# Altium PCB PCB1.PcbDoc (part 2 of 2)
Units mm, origin at the board's own origin, x right, y up, seen from the top; angles counter-clockwise.
Board outline 99.82 x 99.95 mm, 2 copper layers (Top Layer, Bottom Layer); 59 components, 66 nets, 248 pads, 0 vias.
Unrouted connection lines stored in the file: 139.
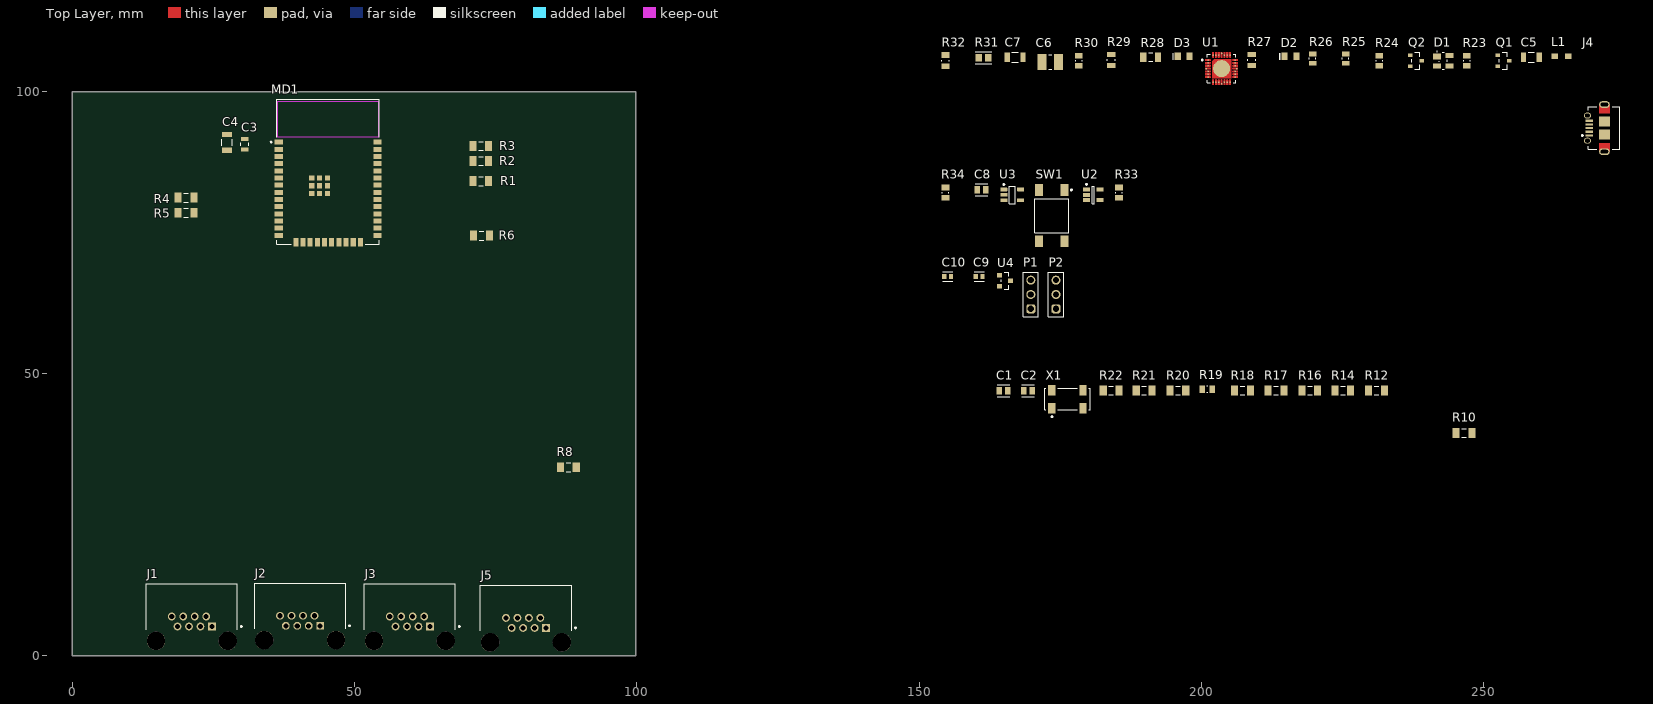
[diagram p0: Top Layer view]

## Part data (continued)
R27 R29: library part CMP-2001-03823-2, "RES Thick Film, 330Ω, 1%, 0.125W, 100ppm/°C, 0805", Case Code (Imperial)=0805, Case Code (Metric)=2012, Manufacturer=Vishay, Max Operating Temperature=155°C, Max Power Dissipation=125mW, Min Operating Temperature=-55°C, Package Height=0.45mm, Package Length=2mm, Package Quantity=10, Package Shape=Rectangular, Package Style=SMTMeter, Package Width=1.25mm, Rated Temperature=70°C, Resistance=330R, Resistor Type="FIXED RESISTOR", Supplier Part Number=541-330CCT-ND, Temperature Coefficient=100ppm/°C, Tolerance=1%, Voltage Rating=150V, Case/Package=0805, Category="Chip SMD Resistors", ComponentLink1Description=https://datasheet.ciiva.com:443/pdfs/VipMasterIC/IC/VISH/VISH-S-A0007266705/VISH-S-A0007266705-1.pdf?src-supplier=IHS+Markit, ComponentLink1URL=https://datasheet.ciiva.com:443/pdfs/VipMasterIC/IC/VISH/VISH-S-A0007266705/VISH-S-A0007266705-1.pdf?src-supplier=IHS+Markit, Composition="Thick Film", Construction=Chip, Contact Plating=Tin, Depth=1.25mm, Features="Automotive AEC-Q200", Height=0.02inch, JESD-609 Code=e3, Lead Free="Lead Free", Length=2mm, Manufacturer Part Number=CRCW0805330RFKEA, Military Standard=Not, Mount="Surface Mount", Mounting Technology="Surface Mount", Number of Terminations=2, Packaging="Tape and Reel", Pins=2, Power=125mW, Power Rating=125mW, Pricing="1=0.1, 10=0.038, 50=0.0248, 100=0.021, 500=0.01462, 1000=0.01273 (USD)", Reach SVHC Compliant=Yes, Reference Standard=AEC-Q200, RoHS=Yes, RoHS Compliant=Yes, Stock=41783, Supplier=Digikey, Technology="METAL GLAZE/THICK FILM", Terminal Finish=Nickel, Termination=SMD/SMT, Voltage Rating (DC)=150V, Weight=0.000194oz, Width=0.049inch, Working Voltage=150V
R28: library part CMP-2003-02566-1, Case/Package=1206, Manufacturer=Susumu, Max Operating Temperature=155°C, Min Operating Temperature=-55°C, Package Height=0.5mm, Package Length=3.2mm, Package Shape=Rectangular, Package Style=SMTMeter, Package Width=1.6mm, Power=250mW, Rated Temperature=85°C, Resistor Type="FIXED RESISTOR", Supplier Part Number=RG32P2.0KBCT-ND, Temperature Coefficient=25ppm/°C, Tolerance=0.1%, Working Voltage=150V, Additional Feature="ULTRA PRECISION", Category="Chip SMD Resistors", ComponentLink1Description=https://datasheet.ciiva.com:443/pdfs/VipMasterIC/IC/SUSU/SUSUS00222/SUSUS00222-1.pdf?src-supplier=IHS+Markit, ComponentLink1URL=https://datasheet.ciiva.com:443/pdfs/VipMasterIC/IC/SUSU/SUSUS00222/SUSUS00222-1.pdf?src-supplier=IHS+Markit, ComponentLink2Description=https://datasheet.ciiva.com/2490/rg-rm-rgh-datasheet-2490469.pdf?src-supplier=Digikey, ComponentLink2URL=https://datasheet.ciiva.com/2490/rg-rm-rgh-datasheet-2490469.pdf?src-supplier=Digikey, ComponentLink3Description=https://datasheet.ciiva.com/7984/1369790-7984253.pdf?src-supplier=Element14, ComponentLink3URL=https://datasheet.ciiva.com/7984/1369790-7984253.pdf?src-supplier=Element14, Construction=Chip, JESD-609 Code=e3, Manufacturer Part Number=RG3216P-2001-B-T1, Mounting Technology="Surface Mount", Packaging="Tape and Reel", Part Number=RG3216P-2001-B-T1, Pins=2, Pricing="1=0.39, 10=0.285, 50=0.2202, 100=0.1956, 500=0.14638 (USD)", RoHS=Yes, RoHS Compliant=Yes, Stock=9791, Supplier=Digikey, Technology="METAL FILM", Terminal Finish=Tin, Termination=Wraparound
R31: library part CMP-26527-001411-1, "22.1kΩ ±1% 0.125W 0805 Thick Film Chip Resistor AEC-Q200 compliant", Case Code (Imperial)=0805, Case Code (Metric)=2012, Manufacturer="Stackpole Electronics", Max Operating Temperature=155°C, Max Power Dissipation=125mW, Min Operating Temperature=-55°C, Package Height=0.5mm, Package Length=2mm, Package Shape=Rectangular, Package Style=SMTMeter, Package Width=1.25mm, Rated Temperature=70°C, Resistance=22.1kR, Resistor Type="Thick Film", Supplier Part Number=RMCF0805FT22K1CT-ND, Temperature Coefficient=100ppm/°C, Tolerance=1%, Working Voltage=150V, Case/Package=0805, Category="Chip SMD Resistors", ComponentLink1Description=https://datasheet.ciiva.com:443/pdfs/VipMasterIC/IC/SEIE/SEIE-S-A0009541969/SEIE-S-A0009541969-1.pdf?src-supplier=IHS+Markit, ComponentLink1URL=https://datasheet.ciiva.com:443/pdfs/VipMasterIC/IC/SEIE/SEIE-S-A0009541969/SEIE-S-A0009541969-1.pdf?src-supplier=IHS+Markit, ComponentLink2Description=https://datasheet.ciiva.com/15193/getdatasheetpartid-409700-15193558.pdf?src-supplier=Verical, ComponentLink2URL=https://datasheet.ciiva.com/15193/getdatasheetpartid-409700-15193558.pdf?src-supplier=Verical, Construction=Rectangular, Contact Plating=Tin, Depth=1.25mm, Features="Automotive AEC-Q200", Height=0.026inch, JESD-609 Code=e3, Lead Free="Lead Free", Length=0.079inch, Manufacturer Part Number=RMCF0805FT22K1, Military Standard=Not, Mount="Surface Mount", Mounting Technology="Surface Mount", Number of Terminations=2, Packaging="Tape and Reel", Pins=2, Power=125mW, Power Rating=125mW, Pricing="1=0.1, 10=0.02, 50=0.0124, 100=0.0103, 500=0.007, 1000=0.00601 (USD)", Radiation Hardening=No, Reach SVHC Compliant=Yes, Reference Standard=AEC-Q200, RoHS=Yes, RoHS Compliant=Yes, Series=RMCF, Size Code=0805, Stock=745768, Supplier=Digikey, Technology="METAL GLAZE/THICK FILM", Terminal Finish=Nickel, Termination=Wraparound, Width=0.049inch
R32: library part CMP-03211-007667-1, "SMD Chip Resistor, Thin Film, 47.5KΩ, 100 V, 0805 [2012 Metric], 100 mW, 0.1%, RN73 Series", Case/Package=0805, Manufacturer="TE Connectivity", Manufacturer Series=RN73, Max Operating Temperature=125°C, Min Operating Temperature=-55°C, Package=RN732A, Package Shape=Rectangular, Power=100mW, Power Rating=0.1W, Rated Temperature=70°C, Resistance=47.5KΩ, Resistor Type="FIXED RESISTOR", Supplier Part Number=A119902CT-ND, Temperature="-55°C to 155°C", Temperature Coefficient=10ppm/°C, Temperature Range High=155°C, Tolerance=0.1%, Voltage Rating=100V, Additional Feature=PRECISION, Automotive=No, Category=Res, ComponentLink1Description=https://datasheet.ciiva.com:443/pdfs/VipMasterIC/IC/TYEC/TYECS00448/TYECS00448-1.pdf?src-supplier=IHS+Markit, ComponentLink1URL=https://datasheet.ciiva.com:443/pdfs/VipMasterIC/IC/TYEC/TYECS00448/TYECS00448-1.pdf?src-supplier=IHS+Markit, ComponentLink2Description=Datasheet, ComponentLink2URL=https://www.te.com/commerce/DocumentDelivery/DDEController?Action=showdoc&DocId=Data+Sheet%7F1773270%7FP%7Fpdf%7FEnglish%7FENG_DS_1773270_P.pdf%7F1676162-2, ComponentLink3Description=https://datasheet.ciiva.com/2547/eng-ds-1773270-m-2547934.pdf?src-supplier=Digikey, ComponentLink3URL=https://datasheet.ciiva.com/2547/eng-ds-1773270-m-2547934.pdf?src-supplier=Digikey, Composition="Thin Film", Device Class L1="Passive Components", Device Class L2=Resistors, Device Class L3="Chip SMD Resistors", Height=0.65mm, Ipc Land Pattern Name=RESC200125X55, Lead Free=Yes, Manufacturer Part Number=RN73C2A47K5BTD, Mounting Technology="Surface Mount", Octopart=https://octopart.com/rn73c2a47k5btd-te+connectivity-22736876, octopart_url=https://octopart.com/rn73c2a47k5btd-te+connectivity-22736876, Packaging="5000 Reel", Pins=2, Pricing="1=0.73, 10=0.521, 50=0.3986, 100=0.3526, 500=0.26204, 1000=0.22944 (USD)", RoHS=TRUE, RoHS Compliant=Yes, Series=RN73, Stock=2760, Supplier=Digikey, Technology="THIN FILM", Temperature Range Low=-55°C, Termination=Wraparound, Working Voltage=100V
SW1: library part CMP-2000-07486-1, "Micro Miniature Push Button Switch FSM JSM, 50 mA, -35 to 85 degC, 4-Pin SMD, RoHS, Tape and Reel", Capacitance=0f, Case\/Package=SMD/SMT, Contact Current Rating=50mA, Contact DC Max Rating R Load=.05A@12VDC, Contact Resistance=100mOhm, Contact Voltage(DC)-Max=12V, Manufacturer="TE Connectivity", Max Operating Temperature=85degC, Min Operating Temperature=-35degC, Operating Force=160gf, Operating Force-Max=2.06N, Package Description="4-Pin Surface Mount Device, Body 6 x 6 mm, Pitch 4.5 mm", Package Quantity=1200, Supplier Part Number=450-1759-1-ND, Voltage Rating (DC)=24V, Actuator Length=0.055inch, Actuator Material=Polyamide, Body Breadth=6inch, Body Height=3.6mm, Body Length or Diameter=6mm, Category="Pushbutton Switches", Circuit Configuration=1X1, ComponentLink1Description=https://datasheet.ciiva.com:443/pdfs/VipMasterIC/IC/TYEL/TYEL-S-A0008743874/TYEL-S-A0008712894-1.pdf?src-supplier=IHS+Markit, ComponentLink1URL=https://datasheet.ciiva.com:443/pdfs/VipMasterIC/IC/TYEL/TYEL-S-A0008743874/TYEL-S-A0008712894-1.pdf?src-supplier=IHS+Markit, ComponentLink2Description=https://datasheet.ciiva.com/5801/eng-cd-2-1437565-7-u2-5801346.pdf?src-supplier=Farnell, ComponentLink2URL=https://datasheet.ciiva.com/5801/eng-cd-2-1437565-7-u2-5801346.pdf?src-supplier=Farnell, ComponentLink3Description=https://datasheet.ciiva.com/23765/1486934-23765878.pdf?src-supplier=Newark, ComponentLink3URL=https://datasheet.ciiva.com/23765/1486934-23765878.pdf?src-supplier=Newark, ComponentLink4Description=https://datasheet.ciiva.com/1530/1683375-1530944.pdf?src-supplier=Element14, ComponentLink4URL=https://datasheet.ciiva.com/1530/1683375-1530944.pdf?src-supplier=Element14, ComponentLink5Description=https://datasheet.ciiva.com/16320/eng-cs-1308111-1-switches-core-program-catalog-0308-16320065.pdf?src-supplier=Future+Electronics, ComponentLink5URL=https://datasheet.ciiva.com/16320/eng-cs-1308111-1-switches-core-program-catalog-0308-16320065.pdf?src-supplier=Future+Electronics, ComponentLink6Description=https://datasheet.ciiva.com/7638/921681-7638037.pdf?src-supplier=Element14, ComponentLink6URL=https://datasheet.ciiva.com/7638/921681-7638037.pdf?src-supplier=Element14, Contact Current(DC)-Max=50mA, Contact Material=CopperAlloy, Contact Plating=Silver, Current Rating=50mA, Datasheet URL=http://www.te.com/commerce/DocumentDelivery/DDEController?Action=showdoc&DocId=Customer+Drawing%7F2-1437565-7%7FV%7Fpdf%7FEnglish%7FENG_CD_2-1437565-7_V.pdf%7F4-1437565-2, Datasheet Version="Rev. V, 02/2015", Electrical Life=100000Cycles, Illumination Type=Illuminated, JESD-609 Code=e4, Manufacturer Part Number=FSM4JSMATR, Manufacturer URL=http://www.te.com/, Max Voltage Rating (DC)=12V, Mechanical Life=100000Cycles, Mount=SurfaceMount, Mounting Technology=SurfaceMount, Number of Switches=1, Orientation=Straight, Package Reference=FSM4JSMATR, Packaging=TapeandReel, Pricing="1=0.36, 10=0.351, 25=0.33, 100=0.2866, 250=0.26, 500=0.24188 (USD)", REACH SVHC=Unknown, Reach SVHC Compliant=Yes, RoHS=Yes, RoHS Compliant=Yes, RoHSCompliant=true, Stock=69097, Supplier=Digikey, Switch Action=MOMENTARY-TACTILE, Switch Function=SPST, Switch Travel=0.25mm, Switch Type=Keypad, Terminal Finish=Silver, Termination=GullWing, Throw Configuration=SPST
U1: library part CMP-08093-000007-1, "IC USB TO UART BRIDGE QFN28"
U2: library part CMP-0138-00207-1, "Voltage Supervisor, 5-Pin SOT-23, Extended Temperature, Tape and Reel", Code_IPC=SOT23-5, DatasheetVersion="revB, Oct-2007", PackageDescription="5-Lead Plastic Small Outline Transistor (OT) [SOT-23]", PackageReference=SOT-23-OT5, PackageVersion="revBB, Aug-2009"
U3: library part CMP-0859-00053-3, "Single 2-Input Positive-AND Gate, DBV0005A, LARGE T&R", F @ Nom Voltage(Max)(Mhz)=150, Generic Part Number=SN74LVC1G08, ICC @ Nom Voltage(Max)(mA)=0.01, Manufacturer="Texas Instruments", Operating Temperature Range(C)="-40 to 125,-40 to 85", Rating=Catalog, tpd @ Nom Voltage(Max)(ns)=4.5,6,4,5, Voltage(Nom)(V)=1.8,2.5,3.3,5, 3-State Output=No, Bits(#)=1, DatasheetVersion=SCES217Y, Gate Type=AND, Input Type=CMOS/TTL, Logic=True, Output Drive (IOL/IOH)(Max)(mA)=32/-32, Output Type=CMOS, PackageReference=DBV0005A, Schmitt Trigger=No, Sub-Family="AND Gate", Technology Family=LVC, VCC(Max)(V)=5.5, VCC(Min)(V)=1.65
U4: library part CMP-12756-000008-1, "IC REG LINEAR 3.3V 150MA SOT23", Case/Package=TSSOP, Dropout Voltage=300mV, Input Voltage Absolute-Max=6.5V, Manufacturer="Diodes Inc.", Max Junction Temp=+85°C, Max Supply Voltage=6V, Min Input Voltage=2V, Nominal Supply Current=25uA, Operating Temperature, TJ-Max=85°C, Operating Temperature, TJ-Min=-40°C, Output Current=150mA, Output Current1-Max=100mA, Output Voltage=3.3V, Output Voltage1-Max=3.366V, Output Voltage1-Min=3.234V, Package=SOT23, Package Body Material=Plastic, Package Equivalence Code=TO-236, Package Shape=Rectangular, Package Style="SMALL OUTLINE, THIN PROFILE, SHRINK PITCHMeter", Peak Reflow Temperature (Cel)=260°C, Supplier Part Number=AP2120N-3.3TRG1DICT-ND, Temperature="-40°C to +85°C", Time @ Peak Reflow Temperature-Max (s)=30s, Voltage Tolerance-Max=2%, Accuracy Percentage=2%, Adjustability=FIXED, Automotive=No, Category=IC, Channels=1, ComponentLink1Description=https://datasheet.ciiva.com:443/pdfs/VipMasterIC/IC/DIOD/DIOD-S-A0008513436/DIOD-S-A0008513436-1.pdf?src-supplier=IHS+Markit, ComponentLink1URL=https://datasheet.ciiva.com:443/pdfs/VipMasterIC/IC/DIOD/DIOD-S-A0008513436/DIOD-S-A0008513436-1.pdf?src-supplier=IHS+Markit, ComponentLink2Description=Datasheet, ComponentLink2URL=https://www.diodes.com/assets/Package-Files/SOT23.pdf, ComponentLink3Description=https://datasheet.ciiva.com/29569/ap2120-29569979.pdf?src-supplier=Digikey, ComponentLink3URL=https://datasheet.ciiva.com/29569/ap2120-29569979.pdf?src-supplier=Digikey, ComponentLink4Description=https://datasheet.ciiva.com/29569/ap2120-29569977.pdf?src-supplier=Digikey, ComponentLink4URL=https://datasheet.ciiva.com/29569/ap2120-29569977.pdf?src-supplier=Digikey, ComponentLink5Description=https://datasheet.ciiva.com/30016/ap2120-30016809.pdf?src-supplier=Avnet, ComponentLink5URL=https://datasheet.ciiva.com/30016/ap2120-30016809.pdf?src-supplier=Avnet, ComponentLink6Description=https://datasheet.ciiva.com/29569/ap2120-29569978.pdf?src-supplier=Digikey, ComponentLink6URL=https://datasheet.ciiva.com/29569/ap2120-29569978.pdf?src-supplier=Digikey, Device Class L1="Integrated Circuits (ICs)", Device Class L2="Power Management ICs", Device Class L3="Voltage Regulators - Linear", Digikey Description="IC REG LINEAR 3.3V 150MA SOT23", Dropout Voltage1-Max=300mV, Dropout Voltage1-Nom=300mV, Footprint Url=https://www.diodes.com/assets/Package-Files/SOT23.pdf, Height=1.1mm, Height - Seated (Max)=1.2mm, Ipc Land Pattern Name=SOT92P240X102-3, JESD-30 Code=R-PDSO-G3, JESD-609 Code=e3, Lead Free=Yes, Length=2.9mm, Line Regulation-Max=0.016%, Load Regulation-Max=0.04%, Manufacturer Part Number=AP2120N-3.3TRG1, Min Supply Voltage=2V, Moisture Sensitivity Level=3, Mouser Description="AP2120 Series 3.3 V 0.15 A Surface Mount CMOS LDO Regulator - SOT23", Number Of Outputs=1, Octopart=https://octopart.com/ap2120n-3.3trg1-diodes+inc.-30954573, Output Type=Fixed, Output Voltage1-Nom=3.3V, Packaging="Tape and Reel", Pins=3, Pricing="1=0.38, 10=0.281, 25=0.246, 100=0.1592, 250=0.1318, 500=0.10544, 1000=0.08084 (USD)", Qualification Status="Not Qualified", Reach SVHC Compliant=Yes, Regulator Type="FIXED POSITIVE SINGLE OUTPUT LDO REGULATOR", RoHS=TRUE, RoHS Compliant=Yes, Standoff Height=0.013mm, Stock=948887, Supplier=Digikey, Surface Mount=Yes, Technology=CMOS, Temperature Range High=+85°C, Temperature Range Low=-40°C, Terminal Finish=Tin, Terminal Form="Gull Wing", Terminal Pitch=0.95mm, Terminal Position=DUAL, Width=1.3mm
X1: library part CMP-2000-05036-1, "Low Frequency Crystal, 32.768 KHz, 6 pF, +/- 20 ppm, -40 to 85 degC, 4-Pin SMD, RoHS, Tape and Reel", Case Height=2.5mm, Case Length=8mm, Case Width=3.8mm, Frequency=32.768kHz, Load Capacitance=6pF, Manufacturer=Abracon, Operating Temperature Range=-40Cto+85C, Package / Case=8mmx3.8mm, Package Description="4-Pin Surface Mount Device, Body 8 x 3.8 mm, Pitch 5.5 mm", Package Reference=ABS25, Tolerance=20PPM, Brand=ABRACON, Datasheet URL=https://datasheet.ciiva.com/854/abs25-854528.pdf, Datasheet Version=Jun-17, Dimensions=3.8mmWx8mmLx2.5mmH, ESR=50kOhms, Factory Pack Quantity=3000, Manufacturer URL=http://www.abracon.com/, Mounting Style=SMD/SMT, Packaging=Reel, Product Category=Crystals, RoHS=Details, Series=ABS25, Termination Style=SMD/SMT, Type=LowFrequencyCrystal

## Nets (pads, with @x,y where several pads share a name; then routed paths per layer and width w, separated by ;. In a path a pad name is that pad's centre, name@x,y a point inside that pad or via, vN(x,y) a via of type N, cw(c..) or ccw(c..) an arc to the next point about the centre after c; other vN are vias at no path point)
3V3: C3.1 C4.1 C6.2 C7.1 J1.2 J2.2 J3.2 MD1.2 P2.2 R19.2 R28.2 R33.2 R34.1 U1.6 U1.7 U2.5
3V3_EXT: J5.1 J5.2 P2.3
3V3_OB: C9.1 P2.1 U4.2
5V: C10.1 D2.1 D3.1 P1.2 U4.3
5V_EXT: J5.7 J5.8 P1.3
5V_IN: C5.1 D1.2 J4.1 L1.2 R31.1
5V_USB: L1.1 P1.1
DTR: Q2.2 R23.1 U1.28
EN: MD1.3 U3.4
GND: C1.1 C2.1 C3.2 C4.2 C5.2 C6.1 C7.2 C8.2 C9.2 C10.2 D1.1 J1.1 J1.6 J2.1 J2.6 J3.1 J3.6 J4.5 J4.6 J4.7 J4.8 J4.9 J4.10 J4.11 J5.4 J5.5 MD1.1 MD1.15 MD1.38 MD1.39 R30.1 R32.1 SW1.3 SW1.4 U1.3 U1.29 U2.2 U4.1
IO0: Q2.3 R6.1
IO2: J1.3 R8.1
IO4: J1.4 R10.1
IO5: J1.5 R12.1
IO12: J1.7 R14.1
IO13: J1.8 R16.1
IO14: J2.3 R17.1
IO15: J2.4 R18.1
IO17: J2.5 R20.1
IO18: J2.7 R21.1
IO19: J2.8 R22.1
IO21: J3.3 R1.2
IO22: J3.4 R2.2
IO23: J3.5 R3.2
IO25: J3.7 R4.2
IO26: J3.8 R5.2
IO32: C1.2 X1.1
IO33: C2.2 X1.4
NetC8_1: C8.1 R33.1 SW1.1
NetD2_2: D2.2 R27.2
NetD3_2: D3.2 R29.2
NetMD1_10: MD1.10 R4.1
NetMD1_11: MD1.11 R5.1
NetMD1_13: MD1.13 R17.2
NetMD1_14: MD1.14 R14.2
NetMD1_16: MD1.16 R16.2
NetMD1_23: MD1.23 R18.2
NetMD1_24: MD1.24 R8.2
NetMD1_25: MD1.25 R6.2
NetMD1_26: MD1.26 R10.2
NetMD1_27: MD1.27 R19.1
NetMD1_28: MD1.28 R20.2
NetMD1_29: MD1.29 R12.2
NetMD1_30: MD1.30 R21.2
NetMD1_31: MD1.31 R22.2
NetMD1_33: MD1.33 R1.1
NetMD1_36: MD1.36 R2.1
NetMD1_37: MD1.37 R3.1
NetQ1_1: Q1.1 R23.2
NetQ2_1: Q2.1 R24.1
NetR28_1: R28.1 U1.9
NetR30_2: R30.2 U1.11
NetR31_2: R31.2 R32.2 U1.8
NetR34_2: R34.2 U2.4
NetSW1_2: SW1.2 U2.3
PRG_RST: Q1.3 U3.1
RST: U2.1 U3.2
RTS: Q1.2 R24.2 U1.24
RX: R26.2 U1.25
RX0: MD1.34 R26.1
RXT: R29.1 U1.18
TX: R25.2 U1.26
TX0: MD1.35 R25.1
TXT: R27.1 U1.19
USB_D_M: D1.4 J4.2 U1.5
USB_D_P: D1.3 J4.3 U1.4
pads on no net: J1. J2. J3. J4.4 J5. J5.3 J5.6 MD1.4 MD1.5 MD1.6 MD1.7 MD1.8 MD1.9 MD1.12 MD1.17 MD1.18 MD1.19 MD1.20 MD1.21 MD1.22 MD1.32 U1.1 U1.2 U1.10 U1.12 U1.13 U1.14 U1.15 U1.16 U1.17 U1.20 U1.21 U1.22 U1.23 U1.27 U3.3 U3.5 X1.2 X1.3

## Text inside footprints (layer, text, board x,y; h text height)
J4: Mechanical 1 "PCB EDGE" at 272.375,99.172 h1 r90